# Altium PCB PCB.PcbDoc
Units mm, origin at the board's own origin, x right, y up, seen from the top; angles counter-clockwise.
Board outline 152.91 x 88.14 mm, 2 copper layers (Top Layer, Bottom Layer); 55 components, 69 nets, 261 pads, 0 vias.
Unrouted connection lines stored in the file: 50.
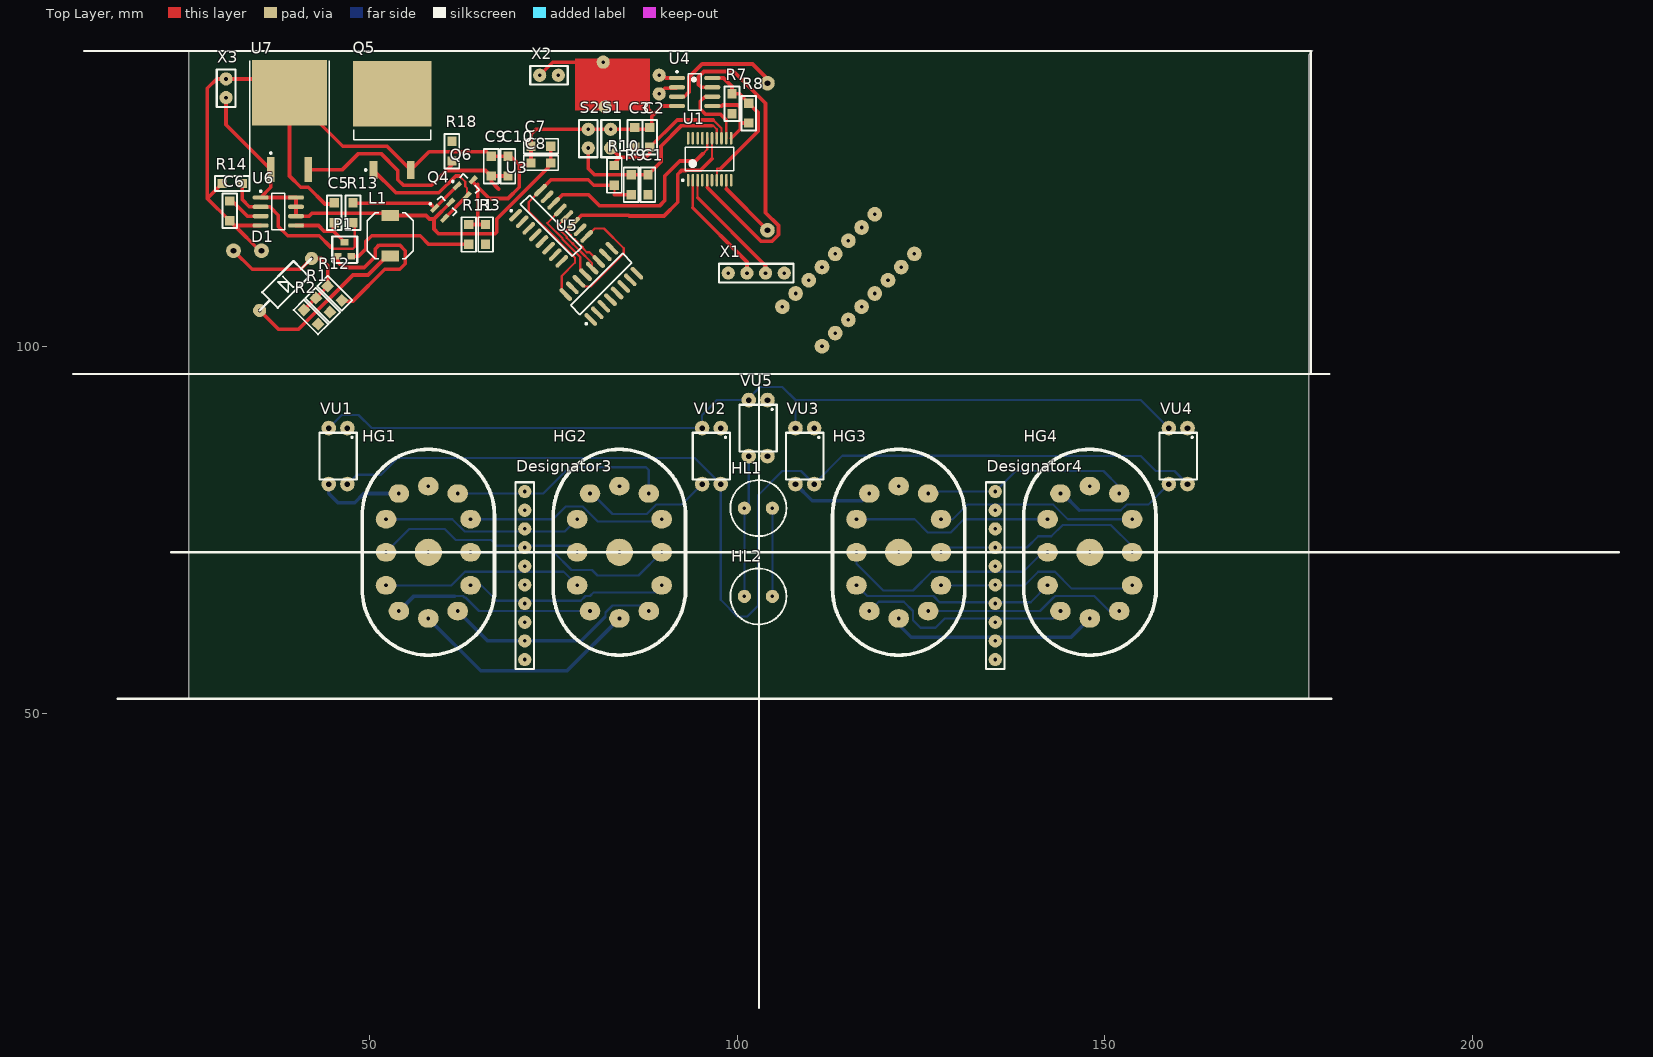
[diagram p0: Top Layer view]
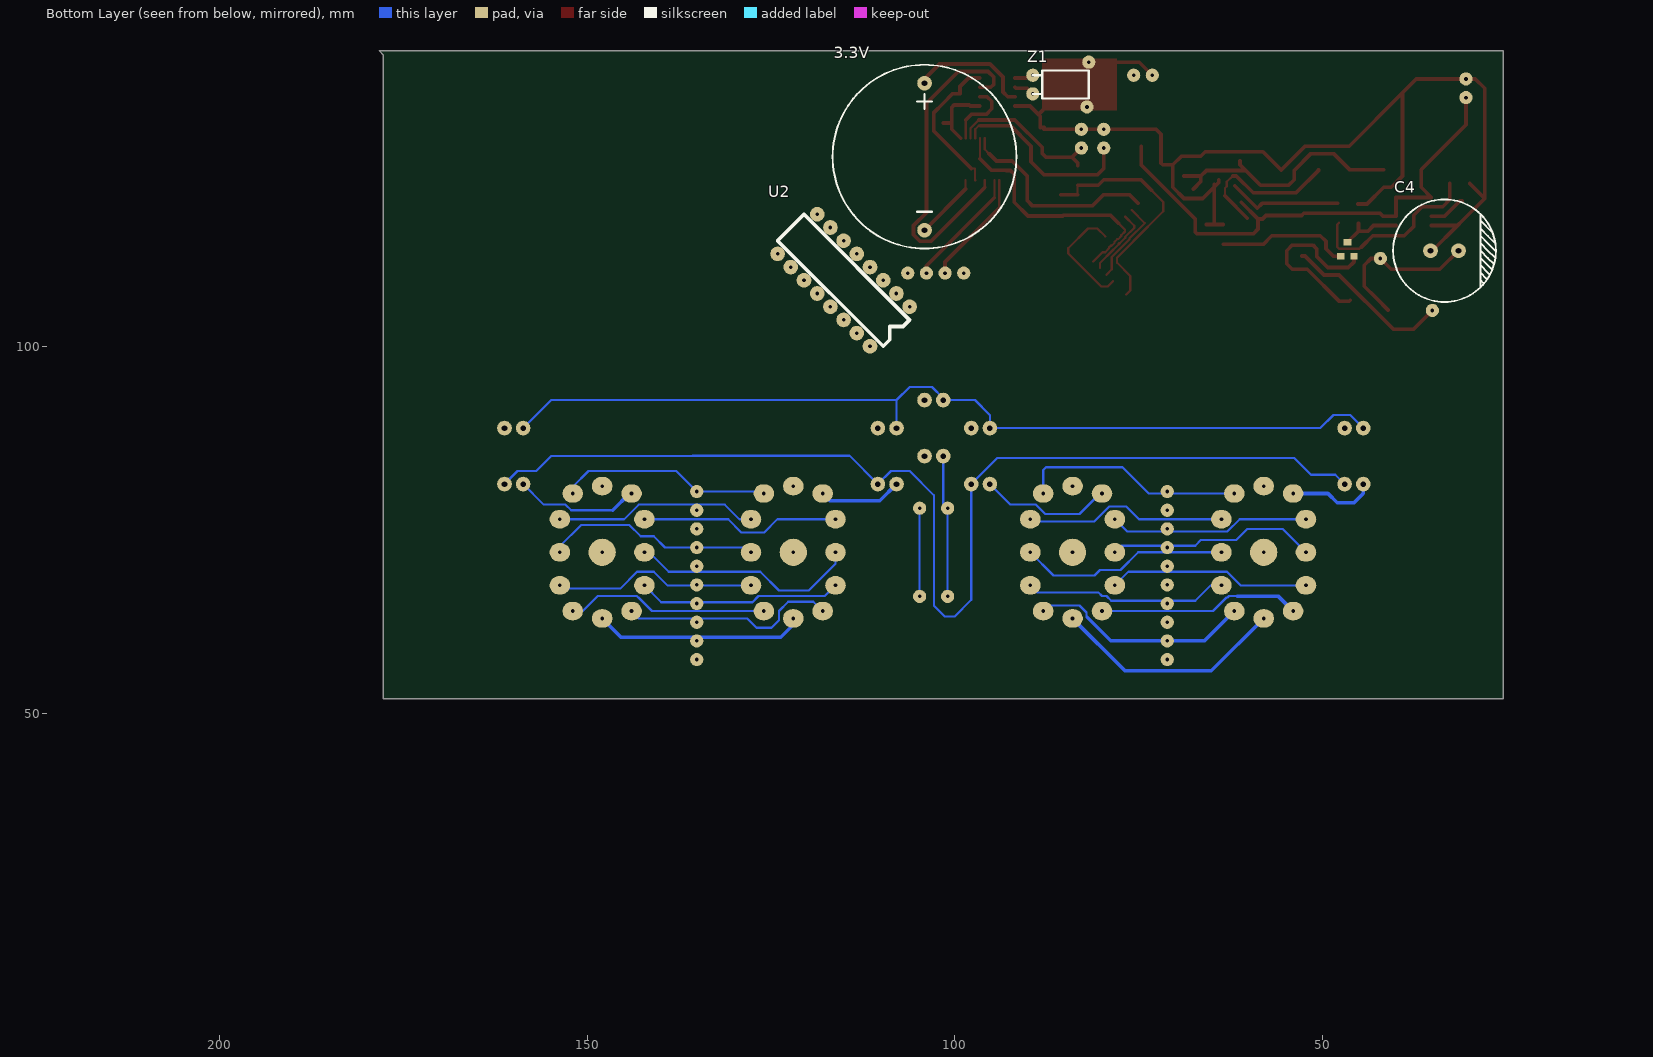
[diagram p1: Bottom Layer view, seen from below]

## Layer stack, top to bottom
Top Solder: solder mask 0.0102, Solder Resist, Dk 3.5
Top Layer: signal copper 0.0356
Dielectric 1: dielectric 0.32, FR-4, Dk 4.8
Bottom Layer: signal copper 0.0356
Bottom Solder: solder mask 0.0102, Solder Resist, Dk 3.5

## Board outline
178.308,140.208 177.8,139.7 177.8,52.07 25.4,52.07 25.4,140.208

## Design rules (kind name [scope] priority, off if disabled: settings)
Clearance [All] p1: gap=0.254
PolygonConnect [All] p1: connectstyle=Relief reliefconductorwidth=0.254 reliefentries=4 polygonreliefangle="90 Angle" airgapwidth=0.254
RoutingVias [All] p1: holewidth=0.711 width=1.27 viastyle="Through Hole" minholewidth=0.711 minwidth=1.27 maxholewidth=0.711 maxwidth=1.27
SolderMaskExpansion [All] p1: expansion=0.102
Width [All] p1: maxlimit=5 minlimit=0.254 preferedwidth=0.5
30 further rules are at their usual default settings.

## Classes and differential pairs
net class Q[1..8]: Q1 Q2 Q3 Q4 Q5 Q6 Q7 Q8

## Components (designator, comment, footprint, x,y, rotation, side; value= is the part's Value field where it differs from the comment)
3.3V "CR2032_Holder_BH-642" BH-642(CR2032) 104.14,115.824 r180 bottom
C1 "1u" C0805 87.884,120.65 r90 top
C2 "1u" C0805 88.138,129.794 r270 top
C3 "1u" C0805 86.106,129.794 r270 top
C4 "Cond_4700uF" Cond_3*1.27 31.496,113.03 r0 bottom
C5 "100" C0805 45.212,119.54 r270 top
C6 "470" C0805 30.988,117.094 r90 top
C7 "Condensator_0805" C0805 74.676,127.254 r180 top
C8 "Condensator_0805" C0805 74.676,124.968 r180 top
C9 "Condensator_0805" C0805 66.548,123.19 r90 top
C10 "Condensator_0805" C0805 68.834,123.19 r90 top
D1 "Diod" DO-41 35.052,104.902 r45 top
Designator3 "Comment" "Pins 10x2.54" 71.12,57.404 r90 top
Designator4 "Comment" "Pins 10x2.54" 135.128,57.404 r90 top
HG1 "ИН-12" ИН-12 58,72 r0 top
HG2 "ИН-12" ИН-12 84,72 r0 top
HG3 "ИН-12" ИН-12 122,72 r0 top
HG4 "ИН-12" ИН-12 148,72 r0 top
HL1 "ИНС-1" INS-1 101,78 r0 top
HL2 "ИНС-1" INS-1 101,66 r0 top
L1 "" B82462G4 52.832,115.062 r270 top
P1 "PVZ3A222 2.2k" PVZ3A222 45.72,112.268 r0 top
Q4 "BCX19" SOT23_N 60.298,118.867 r45 top
Q5 "IRF840AS" D2PAK_N 53.086,130.81 r90 top
Q6 "BC807-16" SOT23_N 63.351,121.92 r45 top
R1 "1020" R0805 42.703,106.58 r315 top
R2 "Resistor" R0805 41.086,104.964 r315 top
R3 "470" R0805 65.786,116.586 r270 top
R7 "10k" R0805 99.314,134.366 r270 top
R8 "10k" R0805 101.6,133.096 r270 top
R9 "10k" R0805 85.598,120.65 r90 top
R10 "10k" R0805 83.312,121.92 r90 top
R11 "3k" R0805 63.5,116.586 r270 top
R12 "560k" R0805 44.319,108.197 r315 top
R13 "330" R0805 47.752,116.84 r90 top
R14 "330" R0805 29.972,122.174 r0 top
R18 "10k" R0805 61.214,125.222 r90 top
S1 "Tact_switch" "Pins 2x2.54" 82.804,129.54 r270 top
S2 "Tact_switch" "Pins 2x2.54" 79.756,129.54 r270 top
U1 "STM8S003" STM8S003_TSOP20 96.266,125.476 r90 top
U2 "К155ИД1" К155ИД1 106.172,105.41 r315 bottom
U3 "SN74HC595D" D016_N 74.709,116.422 r45 top
U4 "DS1307Z+T&R" S8+2_N 94.234,134.62 r0 top
U5 "SN74HC595D" D016_N 81.534,108.52 r135 top
U6 "MC34063AD" 751-05_N 37.592,118.364 r0 top
U7 "L7805ABD2T" TO-263 39.116,129.286 r0 top
VU1 "Optopara_TLP627" Optopara_TLP627 46.99,88.9 r270 top
VU2 "Optopara_TLP627" Optopara_TLP627 97.79,88.9 r270 top
VU3 "Optopara_TLP627" Optopara_TLP627 110.49,88.9 r270 top
VU4 "Optopara_TLP627" Optopara_TLP627 161.29,88.9 r270 top
VU5 "Optopara_TLP627" Optopara_TLP627 104.14,92.71 r270 top
X1 "Pins 4x2.54" "Pins 4x2.54" 98.806,109.982 r0 top
X2 "Pins 2x2.54" "Pins 2x2.54" 75.692,136.906 r180 top
X3 "Pins 2x2.54" "Pins 2x2.54" 30.48,133.858 r90 top
Z1 "Crystal Oscillator" "Crystal osc" 89.408,136.906 r270 bottom

## Footprints (in the part's own frame and the unit in brackets; to place one, negate y for a bottom-side part, rotate by r counter-clockwise, add the part's x,y. Pads: shape width x height; smd on the part's side, far side on the other; paste and mask are expansions set on the pad)
751-05_N [mm] "SOIC, 8-Leads, Body 4.9x3.9mm, Pitch 1.27mm, IPC Medium Density"
  oval 2.2x0.6 smd: 1(-2.4,1.905) 2(-2.4,0.635) 3(-2.4,-0.635) 4(-2.4,-1.905) 5(2.4,-1.905) 6(2.4,-0.635) 7(2.4,0.635) 8(2.4,1.905)
  silkscreen extent -2.52,-2.5 0.9,2.88, body extent -1.95,-2.45 1.95,2.45, height 1.75
B82462G4 [mm] "SM Inductor; 2 Leads; Body 6.3x6.3mm (LxW)"
  rect 1.5x2.4 smd: 1(-2.75,0) 2(2.75,0)
  silkscreen extent -3.15,-3.15 3.15,3.15, body extent -3.15,-3.15 3.15,3.15, height 3
BH-642(CR2032) [mm]
  round 2 hole 0.762: 1(0,0) 2(0,20)
  silkscreen extent -12.5,-2.5 12.5,22.5, body extent -11.3,-2.67 11.3,20.83, height 8.2
C0805 [mm]
  rect 1.27x1.27 smd: 1(0,0) 2(2.7,0)
  silkscreen extent -1,-1 3.7,1, body extent 0.32,-0.66 2.42,0.64, height 0.51
Cond_3*1.27 [mm]
  round 2 hole 0.8: 1(0,0) 2(3.81,0)
  silkscreen extent -5.08,-6.98 8.89,6.98
"Crystal osc" [mm]
  round 1.8 hole 0.5: 1(0,0) 2(2.54,0)
  silkscreen extent -0.63,0 3.18,7.62, body extent -0.21,-0.19 2.79,10.86, height 3
D2PAK_N [mm] "D2-PAK, 4-Leads, Body 8.8x10.4mm, Pitch 2.54mm, Lead Span 15.1mm, IPC Medium Density"
  rect 2.4x1.05 smd: 1(-6.8,2.54) 3(-6.8,-2.54)
  rect 8.9x10.65 smd: 2(3.55,0)
  silkscreen extent -6.92,-5.25 -1.3,5.25, body extent -2.7,-5.28 6.3,5.28, height 4.69
D016_N [mm] "SOIC, 16-Leads, Body 9.9x3.9mm, Pitch 1.27mm, IPC Medium Density"
  oval 2.2x0.6 smd: 1(-2.4,4.445) 2(-2.4,3.175) 3(-2.4,1.905) 4(-2.4,0.635) 5(-2.4,-0.635) 6(-2.4,-1.905) 7(-2.4,-3.175) 8(-2.4,-4.445) 9(2.4,-4.445) 10(2.4,-3.175) 11(2.4,-1.905) 12(2.4,-0.635) 13(2.4,0.635) 14(2.4,1.905) 15(2.4,3.175) 16(2.4,4.445)
  silkscreen extent -2.52,-5 0.9,5.42, body extent -1.95,-4.95 1.95,4.95, height 1.75
DO-41 [mm]
  round 1.8 hole 0.5: 1(0,0) 2(10,0)
  silkscreen extent 0,-1.5 10,1.5, body extent -0.43,-1.22 10.43,1.5, height 3.36
INS-1 [mm]
  round 1.8 hole 0.5: 1(0,0) 2(3.81,0)
  silkscreen extent -1.9,-3.81 5.72,3.81
Optopara_TLP627 [mm]
  round 2 hole 0.762: 1(0,0) 2(0,-2.54) 3(7.62,-2.54) 4(7.62,0)
  silkscreen extent 0.63,-3.81 6.98,1.27, body extent -0.59,-3.56 8.21,1.02, height 4.46
"Pins 2x2.54" [mm]
  round 1.8 hole 0.5: 1(0,0) 2(2.54,0)
  silkscreen extent -1.27,-1.27 3.81,1.27, body extent -1.27,-1.27 3.81,1.27, height 8.81
"Pins 4x2.54" [mm]
  round 1.8 hole 0.5: 1(0,0) 2(2.54,0) 3(5.08,0) 4(7.62,0)
  silkscreen extent -1.27,-1.27 8.89,1.27, body extent -1.27,-1.27 8.89,1.27, height 8.81
"Pins 10x2.54" [mm]
  round 1.8 hole 0.5: 1(0,0) 2(2.54,0) 3(5.08,0) 4(7.62,0) 5(10.16,0) 6(12.7,0) 7(15.24,0) 8(17.78,0) 9(20.32,0) 10(22.86,0)
  silkscreen extent -1.27,-1.27 24.13,1.27, body extent -1.27,-1.27 24.13,1.27, height 8.81
PVZ3A222 [mm]
  rect 1x0.9 all layers, no hole: 1(0,0) 3(1.8,0)
  rect 1.1x0.9 all layers, no hole: 2(0.9,1.9)
  silkscreen extent -0.8,-0.9 2.6,2.7
R0805 [mm]
  rect 1.27x1.27 smd: 1(0,0) 2(2.7,0)
  silkscreen extent -1,-1 3.7,1, body extent 0.31,-0.65 2.41,0.65, height 0.51
S8+2_N [mm] "SOIC, 8-Leads, Body 4.9x3.9mm, Pitch 1.27mm, IPC Medium Density"
  oval 2.2x0.6 smd: 1(-2.4,1.905) 2(-2.4,0.635) 3(-2.4,-0.635) 4(-2.4,-1.905) 5(2.4,-1.905) 6(2.4,-0.635) 7(2.4,0.635) 8(2.4,1.905)
  silkscreen extent -2.52,-2.5 0.9,2.88, body extent -2,-2.5 2,2.5, height 1.75
SOT23_N [mm] "SOT23, 3-Leads, Body 2.9x1.3mm, Pitch 0.95mm, Lead Span 2.3mm, IPC Medium Density"
  rect 1.3x0.6 smd: 1(-1.05,0.95) 2(-1.05,-0.95) 3(1.05,0)
  silkscreen extent -1.17,-1.5 0.7,1.92, body extent -0.7,-1.5 0.7,1.5, height 1.1
STM8S003_TSOP20 [mm]
  oval 1.7x0.35 smd: 1(-2.85,2.925) 2(-2.85,2.275) 3(-2.85,1.625) 4(-2.85,0.975) 5(-2.85,0.325) 6(-2.85,-0.325) 7(-2.85,-0.975) 8(-2.85,-1.625) 9(-2.85,-2.275) 10(-2.85,-2.925) 11(2.85,-2.925) 12(2.85,-2.275) 13(2.85,-1.625) 14(2.85,-0.975) 15(2.85,-0.325) 16(2.85,0.325) 17(2.85,0.975) 18(2.85,1.625) 19(2.85,2.275) 20(2.85,2.925)
  silkscreen extent -2.97,-3.3 1.6,3.77, body extent -2.25,-3.3 2.25,3.3, height 1.2
TO-263 [mm] "D2-PAK/TO-263-AB; 3 Leads (1 Cropped); Body 15.9 (inc. leads) x 10.4 mm (LxW max)"
  rect 1x3.4 smd: 1(-2.54,-5.225) 3(2.54,-5.225)
  rect 10.25x8.9 smd: 4(0,5.225)
  silkscreen extent -5.43,-6.83 5.43,9.57
ИН-12 [mm]
  round 3.7 hole 0.5: 0(0,0)
  oval 2.8x2.5 hole 0.5 unplated: 1(-4,8) 2(-5.75,4.5) 3(-5.75,0) 4(-5.75,-4.5) 5(-4,-8) 6(0,-9) 7(4,-8) 8(5.75,-4.5) 9(5.75,0) 10(5.75,4.5) 11(4,8) 12(0,9)
  silkscreen extent -9,-14 9,14
К155ИД1 [mm]
  round 2 hole 0.5: 1(0,0) 2(0,-2.54) 3(0,-5.08) 4(0,-7.62) 5(0,-10.16) 6(0,-12.7) 7(0,-15.24) 8(0,-17.78) 9(7.62,-17.78) 10(7.62,-15.24) 11(7.62,-12.7) 12(7.62,-10.16) 13(7.62,-7.62) 14(7.62,-5.08) 15(7.62,-2.54) 16(7.62,0)
  silkscreen extent 1.27,-19.05 6.35,1.27, body extent -0.18,-19.05 7.62,1.27, height 5.01

## Part data
C1 C2 C3 C5 C6: library part Condensator_0805
L1: library part B82462G4821M000, "SMT Power Inductor; Size 6.3Ч6.3Ч3.0mm, ±20% Tolerance, 0.82uH, 3.45A"
P1: library part Podstroechnik
Q4: "NPN General-purpose Transistor"
Q5: "HEXFET Power MOSFET"
Q6: "PNP General-purpose Transistor"
R1 R3 R7 R8 R9 R10 R11 R12 R13 R14 R18: library part Resistor
U3 U5: "8-Bit Shift Register with 3-State Output Registers"
U4: "64 x 8, Serial, I2C Real-Time Clock, 5.0V, 8-Pin SO, 0 to 70 degC, Pb-Free, Reel"
U6: "DC-to-DC Converter Control Circuit"
U7: "Precision 1A Regulator"

## Free pads (board coordinates)
  round 1.8 hole 0.5: 2(82.042,132.588) 3(81.788,138.684)

## Nets (pads, with @x,y where several pads share a name; then routed paths per layer and width w, separated by ;. In a path a pad name is that pad's centre, name@x,y a point inside that pad or via, vN(x,y) a via of type N, cw(c..) or ccw(c..) an arc to the next point about the centre after c; other vN are vias at no path point)
GND: 3.3V.1 C1.1 C2.1 C3.1 C4.2 C5.1 C6.1 C7.2 C8.2 C9.2 C10.2 HL1.2 HL2.2 pad.2 pad.3 Q5.3 Q6.3 R3.1 R11.1 R14.1 S1.1 S2.1 U1.9 U2.12 U3.8 U4.4 U5.8 U6.4 U7.4 X1.4 X2.2 X3.2 | length 176.5
  Top Layer w0.3: 98.552,121.412 U1.9@98.552,122.615
  Top Layer w0.5: R14.1 27.94,120.142 ; C4.2@35.052,113.03 31.623,116.459 ; U6.4 31.623,116.459 ; C5.1@45.212,119.38 43.942,119.38 41.656,121.666 40.64,121.666 39.116,123.19 U7.4 ; R11.1 R3.1 ; Q6.3 64.094,122.342 66.294,120.142 68.834,120.142 70.358,121.666 70.358,124.714 ; 64.705,116.648 64.705,122.051 ; X2.2 74.93,138.684 79.248,138.684 ; 87.376,132.842 88.646,131.572 ; C2.1@87.884,129.54 S1.1 S2.1 72.644,129.54 71.976,128.872 C7.2 C8.2 71.722,124.714 70.358,124.714 ; C2.1@87.884,129.794 C2.1 ; C2.1@88.392,129.794 88.392,131.318 88.646,131.572 ; U4.4 89.789,132.715 88.646,131.572 ; 98.552,121.412 3.3V.1 ; 27.94,120.142 27.94,135.128 29.21,136.398 X3.2 37.229,136.398 U7.4 ; 27.94,120.142 C6.1 31.623,116.459 ; U7.4 46.373,127.254 52.382,127.254 Q5.3 58.108,126.492 65.946,126.492 C9.2 C10.2 69.182,125.89 70.358,124.714
  Bottom Layer w0.3: HL2.2 HL1.2
Net3.3V_2: 3.3V.2 U4.3 | length 16.8
  Top Layer w0.5: U4.3 92.837,133.985 93.472,134.62 93.472,136.652 95.25,138.43 102.108,138.43 104.14,136.398 3.3V.2
NetC1_2: C1.2 R9.2 S2.2 U1.14 | length 26.1
  Top Layer w0.3: 96.52,130.048 96.753,130.048 97.241,129.56 U1.14
  Top Layer w0.5: S2.2 79.756,124.206 80.612,123.35 R9.2 C1.2 89.662,125.128 89.662,127.254 92.456,130.048 96.52,130.048
NetC2_2: C2.2 R10.2 S1.2 U1.13 | length 21.5
  Top Layer w0.3: 96.774,130.81 97.891,129.693 U1.13
  Top Layer w0.5: S1.2 84.074,125.73 ; R10.2 83.312,124.968 84.074,125.73 ; 96.774,130.81 91.854,130.81 C2.2 88.138,126.238 87.63,125.73 84.074,125.73
NetC3_2: C3.2 U1.8
NetC5_2: C5.2 P1.2 U6.5 | length 8.6
  Top Layer w0.5: U6.5 43.053,116.459 43.82,115.692 45.096,115.692 ; C5.2@45.096,116.724 45.096,115.692 ; P1.2 45.096,115.692
NetC6_2: C6.2 U6.3 | length 5.1
  Top Layer w0.5: C6.2 31.336,119.794 33.401,117.729 U6.3
NetC7_1: C7.1 C8.1 L1.1 Q4.3 U6.1 U6.6 U6.7 U6.8 U7.1 X3.1 | length 71.5
  Top Layer w0.5: X3.1 30.48,130.157 U7.1 36.576,121.653 U6.1 U6.8 U6.7 U6.6 41.783,117.729 42.164,118.11 52.534,118.11 L1.1 57.702,117.812 58.166,117.348 58.779,117.348 ; Q4.3 58.779,117.348 ; C7.1 C8.1 74.676,124.714 67.31,117.348 67.31,115.57 67.056,115.316 59.436,115.316 58.779,115.973 58.779,117.348
NetD1_1: D1.1 L1.2 Q5.2 | length 23
  Top Layer w0.5: D1.1 37.592,102.362 40.386,102.362 47.752,109.728 49.784,109.728 52.368,112.312 L1.2
NetHG1_1: HG1.1 VU1.3 | length 11.9
  Bottom Layer w0.5: VU1.3 44.45,80.01 45.72,78.74 48.006,78.74 49.266,80 HG1.1
NetHG1_2: HG1.2 HG2.2 HG3.2 HG4.2 U2.15 | length 54.9
  Bottom Layer w0.3: HG1.2 61.261,76.5 62.915,74.846 76.596,74.846 HG2.2 ; HG3.2 124.16,76.5 125.984,74.676 129.032,74.676 130.856,76.5 HG4.2
NetHG1_3: HG1.3 HG2.3 HG3.3 HG4.3 U2.13 | length 59.9
  Bottom Layer w0.3: HG1.3 55.434,75.184 60.198,75.184 61.722,73.66 66.548,73.66 67.31,72.898 77.352,72.898 HG2.3 ; HG3.3 116.25,70.44 119.888,66.802 123.952,66.802 126.492,69.342 138.938,69.342 141.596,72 HG4.3
NetHG1_4: HG1.4 HG2.4 HG3.4 HG4.4 U2.10 | length 55.4
  Bottom Layer w0.3: HG1.4 61.15,67.5 62.992,69.342 76.408,69.342 HG2.4 ; HG3.4 117.71,66.04 126.721,66.04 127.557,65.204 139.954,65.204 HG4.4
NetHG1_5: Designator4.2 HG1.5 HG2.5 HG3.5 HG4.5 U2.8 | length 57.9
  Bottom Layer w0.3: HG1.5 HG1.5@54.475,64 ; 61.595,66.04 62.721,66.04 62.915,65.846 63.059,65.846 64.905,64 HG2.5 ; HG3.5 119.278,65.278 122.682,65.278 123.952,64.008 123.952,62.738 124.968,61.722 127,61.722 128.27,62.992 142.992,62.992 HG4.5
  Bottom Layer w0.5: HG1.5 56.04,66.04 61.595,66.04
NetHG1_6: Designator4.1 HG1.6 HG2.6 HG3.6 HG4.6 U2.2 | length 60.5
  Bottom Layer w0.5: HG1.6 65.12,55.88 76.88,55.88 HG2.6 ; HG3.6 122,62.15 123.698,60.452 145.452,60.452 HG4.6
NetHG1_7: HG1.7 HG2.7 HG3.7 HG4.7 U2.1 | length 58
  Bottom Layer w0.3: 81.996,63.162 82.096,63.262 82.096,63.808 83.058,64.77 86.848,64.77 87.618,64 HG2.7 ; HG3.7 141.216,64 143.062,65.846 143.085,65.846 143.279,66.04 148.59,66.04 150.63,64 HG4.7
  Bottom Layer w0.5: HG1.7 66.04,59.96 78.794,59.96 81.996,63.162
NetHG1_8: HG1.8 HG2.8 HG3.8 HG4.8 U2.9 | length 55.6
  Bottom Layer w0.3: HG1.8 65.215,67.5 67.31,65.405 78.74,65.405 79.375,66.04 80.01,66.04 80.518,66.548 88.798,66.548 HG2.8 ; HG3.8 139.128,67.5 140.97,69.342 143.256,69.342 145.542,67.056 153.306,67.056 HG4.8
NetHG1_9: HG1.9 HG2.9 HG3.9 HG4.9 U2.11 | length 58.2
  Bottom Layer w0.3: HG1.9 75.066,72 77.47,69.596 80.264,69.596 81.026,68.834 86.584,68.834 HG2.9 ; HG3.9 128.394,72.644 139.446,72.644 140.97,74.168 142.748,74.168 144.272,75.692 150.876,75.692 153.75,72.818 HG4.9
NetHG1_10: HG1.10 HG2.10 HG3.10 HG4.10 U2.14 | length 55.3
  Bottom Layer w0.3: HG1.10 74.976,76.5 76.708,78.232 79.007,78.232 81.039,76.2 89.45,76.2 HG2.10 ; HG3.10 129.332,76.5 131.318,78.486 143.025,78.486 145.011,76.5 HG4.10
NetHG1_11: Designator4.10 HG1.11 HG2.11 HG3.11 HG4.11 U2.16 | length 59.9
  Bottom Layer w0.3: HG1.11 73.65,80 77.216,83.566 87.63,83.566 88,83.196 HG2.11 ; HG3.11 126.264,80.264 Designator4.10 137.922,83.058 149.86,83.058 152,80.918 HG4.11
NetHG2_1: HG2.1 VU2.3 | length 18.1
  Bottom Layer w0.3: HG2.1 80.274,80 83.058,77.216 87.705,77.216 88.975,78.486 92.456,78.486 VU2.3
NetHG3_1: HG3.1 VU3.3 | length 11.4
  Bottom Layer w0.5: VU3.3 110.236,78.994 116.994,78.994 HG3.1
NetHG4_1: HG4.1 VU4.3 | length 17.2
  Bottom Layer w0.3: 146.558,77.724 152.213,77.724 152.975,78.486 155.956,78.486 VU4.3
  Bottom Layer w0.5: HG4.1 144.282,80 146.558,77.724
NetHL1_1: HL1.1 HL2.1 VU5.3 | length 19.3
  Bottom Layer w0.3: HL2.1 HL1.1 101.6,78.6 VU5.3
NetP1_1: P1.1 R12.2 | length 25
  Top Layer w0.5: P1.1 45.72,111.506 46.482,110.744 49.276,110.744 50.8,112.268 50.8,113.284 51.308,113.792 54.102,113.792 54.864,113.03 54.864,111.252 54.102,110.49 52.07,110.49 47.752,106.172 46.344,106.172 R12.2
NetP1_3: P1.3 R11.2 | length 18.2
  Top Layer w0.5: P1.3 48.514,112.268 49.53,113.284 49.53,114.3 50.292,115.062 56.896,115.062 58.072,113.886 R11.2
NetQ1_1: 
NetQ1_2: 
NetQ2_1: 
NetQ2_2: 
NetQ3_1: 
NetQ3_2: 
NetQ4_1: Q4.1 Q6.1 R13.2 | length 15.5
  Top Layer w0.5: R13.2@47.932,119.466 58.214,119.466 Q4.1 Q6.1
NetQ4_2: Q4.2 Q5.1 Q6.2 | length 21.4
  Top Layer w0.3: 62.23,123.19 63.013,122.407 63.013,121.779 63.28,121.512 Q6.2
  Top Layer w0.5: Q5.1 50.546,123.952 53.594,120.904 59.436,120.904 61.722,123.19 62.23,123.19 ; Q4.2 Q6.2
NetR1_2: R1.2 VU5.4
NetR2_2: R2.2 VU1.4 VU2.4 VU3.4 VU4.4 | length 154.8
  Bottom Layer w0.3: VU1.4 48.26,82.55 51.562,82.55 53.848,84.836 94.234,84.836 VU2.4 97.79,65.532 100.076,63.246 101.346,63.246 102.87,64.77 102.87,79.756 106.172,83.058 108.712,83.058 VU3.4 114.334,85.124 135.668,85.124 135.702,85.09 154.94,85.09 156.972,83.058 159.512,83.058 VU4.4
NetR3_2: R3.2 VU1.2 VU2.2 VU3.2 VU4.2 VU5.2 | length 125.4
  Bottom Layer w0.3: VU1.2 46.228,90.678 48.514,90.678 50.292,88.9 VU2.2 95.25,90.678 97.282,92.71 VU5.2 101.6,92.964 103.124,94.488 106.172,94.488 107.95,92.71 ; VU3.2 107.95,92.71 ; VU4.2 154.94,92.71 107.95,92.71
NetR4_2: 
NetR5_2: 
NetR6_2: 
NetR7_2: R7.2 U1.12 U4.6 | length 9.6
  Top Layer w0.3: U1.12 98.541,130.821
  Top Layer w0.5: U4.6 95.631,133.985 94.996,133.35 94.996,132.334 95.758,131.572 97.79,131.572 98.541,130.821
NetR8_2: R8.2 U1.11 U4.5 | length 9.8
  Top Layer w0.5: U4.5 97.917,132.715 98.044,132.842 100.121,132.842 100.453,132.51 100.453,129.559 U1.11@99.22,128.326 ; 100.547,130.396 R8.2
NetR13_1: R13.1 R14.2 U6.2 | length 24.7
  Top Layer w0.3: 44.704,113.538 44.958,113.284 47.752,113.284 48.006,113.538 48.006,116.586 R13.1
  Top Layer w0.5: R14.2 32.672,119.982 33.655,118.999 U6.2 36.449,118.999 37.592,117.856 37.592,116.332 38.862,115.062 43.18,115.062 44.704,113.538
NetR18_2: R18.2 U1.4
NetU1_2: U1.2 X1.2 | length 15.7
  Top Layer w0.3: 93.98,118.872 U1.2@93.98,122.615
  Top Layer w0.5: 93.98,118.872 101.346,111.506 X1.2
NetU1_3: U1.3 X1.3 | length 16.5
  Top Layer w0.3: 94.641,120.243 U1.3
  Top Layer w0.5: 94.641,120.243 103.886,110.998 X1.3
NetU1_5: U1.5 U4.7 | length 47
  Top Layer w0.3: 95.941,121.641 U1.5
  Top Layer w0.5: 95.941,121.641 103.262,114.32 104.763,114.32 105.644,115.201 105.644,116.447 103.886,118.205 103.886,133.096 99.568,137.414 95.504,137.414 94.742,136.652 94.742,135.636 95.123,135.255 U4.7
NetU1_10: U1.10 U3.13 U5.13 | length 11.7
  Top Layer w0.3: U3.13 74.17,116.781 76.273,114.678 76.273,114.558 78.66,112.171 78.66,110.495 U5.13
NetU1_15: U1.15 U3.11 U5.11 | length 35.3
  Top Layer w0.3: U3.11 76.864,115.883 76.864,115.654 77.381,115.137 77.381,115.017 77.794,114.605 77.914,114.605 78.279,114.239 78.279,114.119 78.692,113.707 78.812,113.707 79.05,113.469 79.05,113.349 79.568,112.83 79.918,112.83 U5.11 ; 96.591,125.547 U1.15
  Top Layer w0.5: U3.11 78.837,117.856 85.247,117.856 85.344,117.759 90.073,117.759 91.948,119.634 91.948,123.444 92.456,123.952 93.032,123.952 93.06,123.98 95.024,123.98 96.591,125.547
NetU1_16: U1.16 U3.14 | length 28.7
  Top Layer w0.3: 95.362,126.238 95.941,126.817 U1.16
  Top Layer w0.5: U3.14 76.243,120.65 79.799,120.65 81.323,119.126 89.451,119.126 90.17,119.845 90.17,123.19 92.202,125.222 94.346,125.222 95.362,126.238
NetU1_18: U1.18 X1.1
NetU2_3: U2.3 U5.15
NetU2_4: U2.4 U5.1
NetU2_6: U2.6 U5.2
NetU2_7: U2.7 U5.3
NetU3_9: U3.9 U5.14 | length 15.6
  Top Layer w0.3: U5.14 79.199,108.16 80.097,108.16 84.587,112.651 84.587,113.369 81.893,116.063 80.636,116.063 U3.9
NetU3_12: U3.12 U5.12 | length 9.5
  Top Layer w0.3: U3.12 75.607,116.422 75.607,116.128 76.827,114.908 76.827,114.787 77.564,114.051 77.685,114.051 77.725,114.01 77.725,113.889 78.462,113.153 78.496,113.153 78.496,113.119 80.286,111.329 U5.12
NetU4_1: U4.1 Z1.1 | length 2.6
  Top Layer w0.5: Z1.1 89.916,136.906 90.297,136.525 U4.1
NetU4_2: U4.2 Z1.2 | length 2.8
  Top Layer w0.5: Z1.2 90.17,135.128 91.707,135.128 U4.2
Q1: U3.15 VU1.1
Q2: U3.1 VU2.1
Q3: U3.2 VU3.1
Q4: U3.3 VU4.1
Q5: U3.4 VU5.1
Q6: U3.5
Q7: U3.6
Q8: U3.7
VCC: C9.1 C10.1 R7.1 R8.1 R9.1 R10.1 R18.1 U1.7 U2.5 U3.16 U4.8 U5.16 U7.3 X2.1 | length 89.1
  Top Layer w0.3: U3.16 71.656,119.655 71.656,118.398 75.717,114.337 75.717,114.331 77.939,112.109 77.939,111.39 76.146,109.597 76.146,107.622 U5.16 ; 83.312,120.65 R10.1 ; U1.7 97.282,122.667 97.282,124.206 97.79,124.206
  Top Layer w0.5: U7.3 46.337,124.061 48.514,126.238 51.562,126.238 53.848,123.952 53.848,122.682 54.61,121.92 58.42,121.92 60.452,123.952 ; R18.1 61.214,124.714 60.452,123.952 ; 67.564,121.412 66.548,122.428 C9.1 ; C10.1 C9.1 ; U3.16 74.679,122.679 79.759,122.679 80.518,121.92 R10.1 ; 83.312,120.65 R9.1 ; U4.8 98.171,136.525 99.314,135.382 R7.1 100.33,134.366 R8.1 102.87,131.826 102.87,129.286 97.79,124.206 ; 60.452,123.952 65.786,123.952 C9.1
VCC1: C4.1 D1.2 R1.1 R2.1 R12.1 | length 22.3
  Top Layer w0.5: C4.1 34.036,110.49 40.64,110.49 D1.2 43.406,111.973 44.319,111.06 R12.1 R1.1 R2.1
pads on no net: Designator3.1 Designator3.2 Designator3.3 Designator3.4 Designator3.5 Designator3.6 Designator3.7 Designator3.8 Designator3.9 Designator3.10 Designator4.3 Designator4.4 Designator4.5 Designator4.6 Designator4.7 Designator4.8 Designator4.9 HG1.0 HG1.12 HG2.0 HG2.12 HG3.0 HG3.12 HG4.0 HG4.12 U1.1 U1.6 U1.17 U1.19 U1.20 U3.10 U5.4 U5.5 U5.6 U5.7 U5.9 U5.10

## Other copper
Top Layer:
  rectangle net GND: 77.978,132.08 88.138,139.192

## Silkscreen, mask and mechanical layers (free items; w line width, h text height)
Top Overlay:
  lines w0.3: 9.652,96.266 180.594,96.266 ; 11.176,140.208 178.054,140.208 178.054,96.266 ; 15.748,52.07 180.848,52.07 ; 23,72 220,72 ; 103,10 103,96.266